# EAGLE board ethernet-cp2200 (EAGLE 7.2.0)
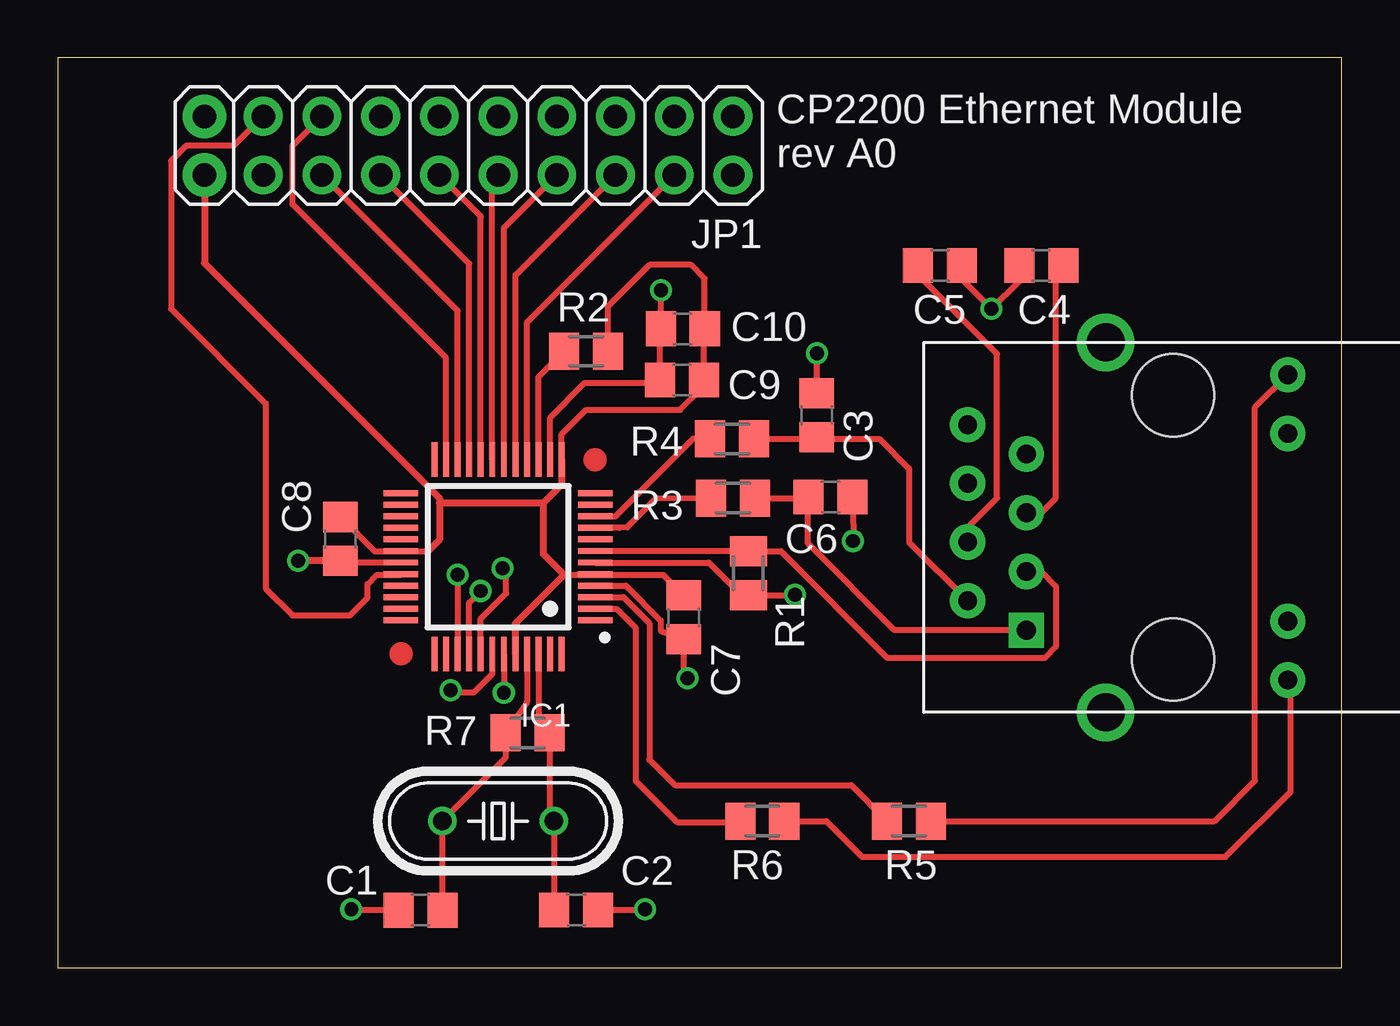
[diagram p0: board, top side]
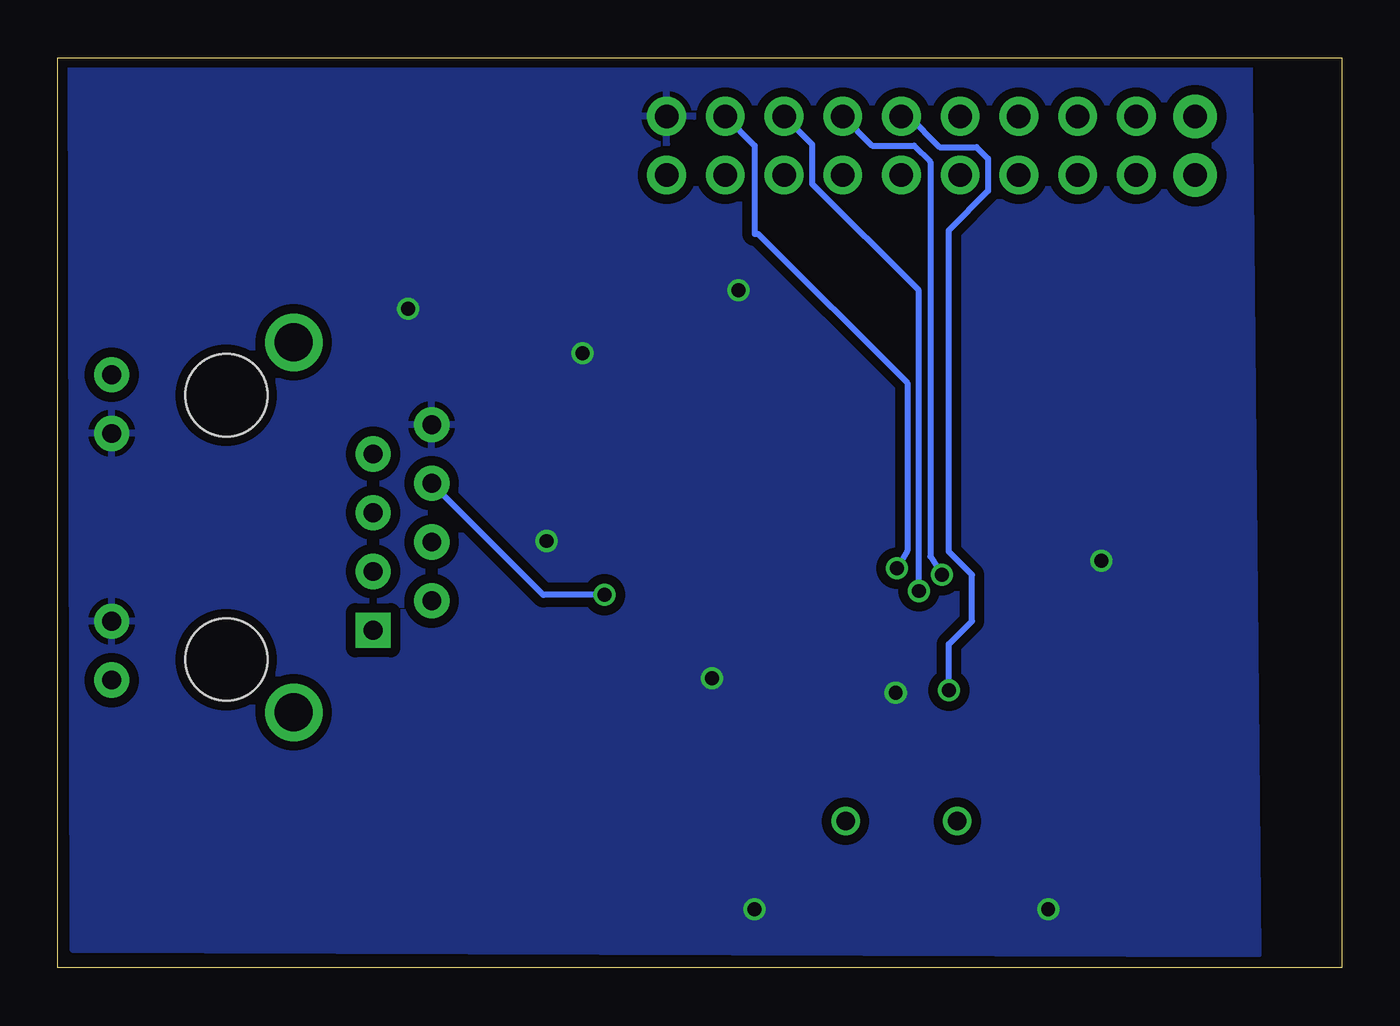
[diagram p1: board, bottom side, seen from below]

Size 55.55 x 39.36 mm. Coordinates in mm from the lower left corner, seen from the top.
Outline: 0,0 55.55,0 55.55,39.36 0,39.36 0,0
Copper layers (1*16): Top 0.0356mm / dielectric 1.5011mm / Bottom 0.0356mm
Design rules "LaenPCBOrder": minimum track width 6mil, minimum drill 13mil, track to track 6mil, track to pad 6mil, pad to pad 6mil, via to via 6mil, smd to smd 6mil, copper to edge 15mil, drill to drill 6mil, minimum pad ring 7mil, minimum via ring 7mil, stop-mask expansion 3mil, vias tented up to drill 0mil, thermal gap 10mil

## Footprints (pad centres in the part's own frame; a part is rotated, then mirrored left to right if it is on the bottom)
C0805 = smd 1.3 x 1.5: 1 -0.95,0; 2 0.95,0
TQFP-48 = smd 1.5 x 0.254: 1 -4.2,2.75; 2 -4.2,2.25; 3 -4.2,1.75; 4 -4.2,1.25; 5 -4.2,0.75; 6 -4.2,0.25; 7 -4.2,-0.25; 8 -4.2,-0.75; 9 -4.2,-1.25; 10 -4.2,-1.75; 11 -4.2,-2.25; 12 -4.2,-2.75; 25 4.2,-2.75; 26 4.2,-2.25; 27 4.2,-1.75; 28 4.2,-1.25; 29 4.2,-0.75; 30 4.2,-0.25; 31 4.2,0.25; 32 4.2,0.75; 33 4.2,1.25; 34 4.2,1.75; 35 4.2,2.25; 36 4.2,2.75 | smd 0.254 x 1.5: 13 -2.75,-4.2; 14 -2.25,-4.2; 15 -1.75,-4.2; 16 -1.25,-4.2; 17 -0.75,-4.2; 18 -0.25,-4.2; 19 0.25,-4.2; 20 0.75,-4.2; 21 1.25,-4.2; 22 1.75,-4.2; 23 2.25,-4.2; 24 2.75,-4.2; 37 2.75,4.2; 38 2.25,4.2; 39 1.75,4.2; 40 1.25,4.2; 41 0.75,4.2; 42 0.25,4.2; 43 -0.25,4.2; 44 -0.75,4.2; 45 -1.25,4.2; 46 -1.75,4.2; 47 -2.25,4.2; 48 -2.75,4.2
2X10 = drill 1.016 pad 1.676: 1 -11.43,-1.27; 2 -11.43,1.27; 3 -8.89,-1.27; 4 -8.89,1.27; 5 -6.35,-1.27; 6 -6.35,1.27; 7 -3.81,-1.27; 8 -3.81,1.27; 9 -1.27,-1.27; 10 -1.27,1.27; 11 1.27,-1.27; 12 1.27,1.27; 13 3.81,-1.27; 14 3.81,1.27; 15 6.35,-1.27; 16 6.35,1.27; 17 8.89,-1.27; 18 8.89,1.27 | drill 1.016 pad 1.88: 19 11.43,-1.27; 20 11.43,1.27
HC49/S = drill 0.813: 1 -2.413,0; 2 2.413,0
M0805 = smd 1.3 x 1.6: 1 -0.95,0; 2 0.95,0
HR911105A = drill 0.813 pad 1.524: G+ 4.953,-6.604; G- 4.953,-4.064; GND -8.89,4.445; NC -6.35,3.175; P4 -8.89,-0.635; P5 -6.35,0.635; RD+ -6.35,-1.905; RD- -8.89,1.905; TD- -8.89,-3.175; Y+ 4.953,6.604; Y- 4.953,4.064 | drill 1.651 pad 2.159: SHIELD0 -2.921,8.001; SHIELD1 -2.921,-8.001 | drill 0.813 pad 1.524 square: TD+ -6.35,-4.445 | hole 3.556: 0,-5.715; 0,5.715

## Placement (x,y rotation side)
C1  22pF  [C0805]  15.69,2.5 180 top
C2  22pF  [C0805]  22.43,2.5 0 top
C3  0.001uF  [C0805]  32.84,23.9 90 top
C4  0.1uF  [C0805]  42.55,30.38 180 top
C5  0.1uF  [C0805]  38.17,30.38 0 top
C6  0.001uF  [C0805]  33.43,20.36 0 top
C7  0.1uF  [C0805]  27.08,15.16 270 top
C8  0.1uF  [C0805]  12.23,18.55 270 top
C9  0.1uF  [C0805]  27.02,25.43 180 top
C10  10uF  [C0805]  27.04,27.64 180 top
IC1  CP2200-GQ  [TQFP-48]  19.05,17.78 180 top
JP1  [2X10]  17.78,35.56 180 top
Q1  20MHz  [HC49/S]  19.05,6.35 0 top
R1  100  [M0805]  29.88,17.07 90 top
R2  4.7K  [M0805]  22.86,26.67 0 top
R3  8  [M0805]  29.21,20.32 180 top
R4  8  [M0805]  29.17,22.88 180 top
R5  330  [M0805]  36.83,6.35 0 top
R6  330  [M0805]  30.48,6.35 0 top
R7  10M  [M0805]  20.32,10.16 0 top
RJ1  HR911105A  [HR911105A]  48.26,19.05 0 top

## Library data of the parts
C1-C10 R1-R7 = resistor
IC1 = silabs-eth
JP1 = SparkFun-Connectors
Q1 = crystal; OC_FARNELL: 1667008; OC_NEWARK: unknown
RJ1 = CONNECTER

## Nets
+3V3: C7.1 C8.1 C9.1 C10.1 IC1.5 IC1.13 IC1.30 IC1.44 JP1.20 R2.2
GND: C1.2 C2.2 C3.2 C4.2 C5.2 C6.2 C7.2 C8.2 C9.2 C10.2 IC1.4 IC1.14 IC1.31 IC1.43 JP1.1 RJ1.G- RJ1.GND RJ1.Y-
GREEN: IC1.2 R6.1
N$1: C2.1 IC1.46 Q1.2 R7.2
N$2: C1.1 IC1.45 Q1.1 R7.1
N$4: IC1.6 R1.1 RJ1.RD-
N$5: IC1.7 R1.2 RJ1.RD+
N$6: IC1.9 R3.2
N$7: C6.1 R3.1 RJ1.TD+
N$8: IC1.10 R4.2
N$9: R5.2 RJ1.Y+
N$10: R6.2 RJ1.G+
N$11: IC1.32 JP1.17
N$12: C3.1 R4.1 RJ1.TD-
N$13: IC1.16 JP1.4
N$14: C5.1 RJ1.P4
N$15: C4.1 RJ1.P5
N$16: IC1.17 JP1.6
N$18: IC1.18 JP1.8
N$19: IC1.19 JP1.10
N$20: IC1.20 JP1.12
N$21: IC1.21 JP1.14
N$22: IC1.22 JP1.16
N$23: IC1.23 JP1.15
N$25: IC1.41 JP1.3
N$26: IC1.40 JP1.5
N$27: IC1.39 JP1.7
N$28: IC1.42 JP1.9
N$29: IC1.15 R2.1
YELLOW: IC1.3 R5.1

## Tracks (layer width: path | path; a pad name or v marks a point on that pad's centre or on a via)
+3V3
  Top 0.254: C7.1 26.19,17 23.28,17 IC1.5 23.22,17 21.9,17 | 16,18 14.88,18 IC1.30 14.82,18 13.73,18 C8.1 | IC1.13 21.8,23.07 22.86,24.13 26.93,24.13 27.8,25 27.8,25.27 C9.1 27.96,27.61 C10.1 27.99,29.81 27.4,30.4 25.6,30.4 23.81,28.61 R2.2
  Top 0.305: JP1.20 6.35,30.48 16.51,20.32 16.51,20.1 | 16.51,20.1 16.51,18.51 16,18 | IC1.13 21.8,20.9 21,20.1 | 21,20.1 16.51,20.1 | 21,20.1 21,17.9 21.9,17 19.8,14.9 IC1.44
GND  (via drill 0.6)
  Top 0.254: C1.2 12.74,2.5 | C2.2 25.36,2.5 | IC1.4 24.58,16.53 26.08,15.02 26.08,14.59 C7.2 27.08,12.69 | IC1.31 12.3,17.53 | IC1.43 v19.3,11.9 | IC1.14 21.3,23.8 22.8,25.3 25.93,25.3 C9.2 26.07,27.61 C10.2 v26.09,29.29 v26.1,29.3 | C5.2 39.12,29.78 v40.4,28.5 41.6,29.7 C4.2 | C6.2 34.42,18.83 | C3.2 v32.84,26.59
  Top 0.305: 12.74,2.5 v12.7,2.54 | 25.36,2.5 v25.4,2.54 | 27.08,12.69 v27.24,12.53 | 12.3,17.53 C8.2 v10.4,17.6 | 34.42,18.83 v34.4,18.46
  pour Bottom (isolate 0.406): 4,40.27 55,40.27 54.9,0.8 3.6,0.6
GREEN
  Top 0.254: IC1.2 24.17,15.53 25,14.7 25,8.1 26.8,6.3 29.48,6.3
  Top 0.305: 29.48,6.3 R6.1
N$1
  Top 0.254: C2.1 21.48,6.35 Q1.2 21.27,6.54 R7.2 | IC1.46 20.8,10.63
  Top 0.305: 20.8,10.63 R7.2
N$2
  Top 0.254: IC1.45 20.3,11.49 R7.1 19.37,9.08 Q1.1 C1.1
  Top 0.305: C1.1
N$4  (via drill 0.6)
  Top 0.254: IC1.6 28.17,17.53 29.3,16.4 | R1.1 v31.88,16.12 v31.89,16.13
  Top 0.305: 29.3,16.4 29.6,16.4 R1.1
  Bottom 0.254: RJ1.RD- 34.53,16.12 34.52,16.13 v31.89,16.13
N$5
  Top 0.254: IC1.7 R1.2 | RJ1.RD+ 42.55,17.14 43.18,16.51 43.18,13.88 42.7,13.4 35.9,13.4 31.28,18.02 R1.2
  Top 0.305: R1.2
N$6
  Top 0.254: R3.2 25.87,20.28 24.63,19.05 24.29,19.03 IC1.9
N$7
  Top 0.254: RJ1.TD+ 36.2,14.61 32.5,18.32 32.44,18.38 32.44,20.32 | R3.1 32.44,20.32 | 32.44,20.32 C6.1
N$8
  Top 0.254: IC1.10 24.13,19.53 27.5,22.9 28.22,22.9 R4.2
N$9
  Top 0.254: R5.2 50.05,6.35 51.8,8.1 51.8,24.24 RJ1.Y+
N$10
  Top 0.254: R6.2 33.25,6.35 34.8,4.8 50.52,4.8 53.34,7.62 53.34,12.32 RJ1.G+
N$11
  Top 0.254: JP1.17 7.62,35.56 5.56,35.56 4.9,34.9 4.9,28.5 9,24.4 9,16.4 10.16,15.24 12.64,15.24 13.4,16 13.4,16.6 13.8,17 14.82,17 IC1.32
N$12
  Top 0.254: R4.1 32.77,22.88 | 32.77,22.88 C3.1 | 32.77,22.88 35.54,22.88 36.83,21.59 36.83,18.41 RJ1.TD-
N$13
  Top 0.254: IC1.16 20.3,27.92 JP1.4
N$14
  Top 0.254: RJ1.P4 39.37,19.05 40.64,20.32 40.64,26.56 37.3,29.9
  Top 0.305: 37.3,29.9 37.3,30.3 C5.1
N$15
  Top 0.254: RJ1.P5 42.55,19.68 43.18,20.32 43.18,30.06
  Top 0.305: 43.18,30.06 C4.1
N$16
  Top 0.254: IC1.17 19.8,29.96 JP1.6
N$18
  Top 0.254: IC1.18 19.3,32 JP1.8
N$19
  Top 0.254: IC1.19 18.8,34.04 JP1.10
N$20
  Top 0.254: IC1.20 18.3,32.5 JP1.12
N$21
  Top 0.254: IC1.21 17.8,30.46 JP1.14
N$22
  Top 0.254: IC1.22 17.3,28.42 JP1.16
N$23
  Top 0.254: IC1.23 16.8,26.38 10.16,33.02 10.16,35.56 JP1.15
N$25  (via drill 0.6)
  Top 0.254: IC1.41 18.3,15.1 19.4,16.2 19.4,17.03 v19.25,17.28
  Bottom 0.254: JP1.3 25.4,35.56 25.4,31.75 25.25,31.75 18.8,25.3 18.8,18.03 v19.25,17.28
N$26  (via drill 0.6)
  Top 0.254: IC1.40 17.8,15.8 v18.3,16.3
  Bottom 0.254: v18.3,16.3 18.3,29.3 22.9,33.9 22.9,35.6 JP1.5
N$27  (via drill 0.6)
  Top 0.254: v17.3,17 IC1.39
  Bottom 0.254: v17.3,17 17.8,17.8 17.8,34.86 18.5,35.56 20.32,35.56 JP1.7
N$28  (via drill 0.6)
  Top 0.254: IC1.42 18.8,12.7 18,11.9 17.1,11.9 v17,12
  Bottom 0.254: v17,12 17,14 16,15 16,17 17,18 17,31.9 15.3,33.6 15.3,35 15.8,35.5 17.4,35.5 18.73,36.83 JP1.9
N$29
  Top 0.254: IC1.15 20.8,25.56 R2.1
YELLOW
  Top 0.254: IC1.3 24.47,16.03 25.6,14.9 25.6,9 26.7,7.9 34.33,7.9 R5.1

## Text on the board
tPlace: CP2200 Ethernet Module / rev A0